# EAGLE board Goethe_Stromfluss (EAGLE 7.7.0)

Size 57.15 x 53.34 mm. Coordinates in mm from the lower left corner, seen from the top.
Copper layers (1*16): Top 0.035mm / dielectric 1.5mm / Bottom 0.035mm
Design rules "default": minimum track width 10mil, minimum drill 24mil, track to track 8mil, track to pad 8mil, pad to pad 8mil, via to via 8mil, smd to smd 8mil, copper to edge 40mil, drill to drill 8mil, minimum pad ring 10mil, minimum via ring 8mil, stop-mask expansion 4mil, vias tented up to drill 0mil, thermal gap 10mil

## Footprints (pad centres in the part's own frame; a part is rotated, then mirrored left to right if it is on the bottom)
C025-025X050 = drill 0.813 octagon: 1 -1.27,0; 2 1.27,0
1X03/90 = drill 1.016 long: 1 -2.54,-3.81; 2 0,-3.81; 3 2.54,-3.81
1X04/90 = drill 1.016 long: 1 -3.81,-3.81; 2 -1.27,-3.81; 3 1.27,-3.81; 4 3.81,-3.81
LED3MM = drill 0.813 octagon: A -1.27,0; K 1.27,0
ARDUINOR3_SMALL = drill 1 pad 1.676 octagon: 3V 24.13,2.54; 5V 26.67,2.54; A0 39.37,2.54; A1 41.91,2.54; A2 44.45,2.54; A3 46.99,2.54; A4 49.53,2.54; A5 52.07,2.54; AREF 12.446,50.8; D0 52.07,50.8; D1 49.53,50.8; D2 46.99,50.8; D3 44.45,50.8; D4 41.91,50.8; D5 39.37,50.8; D6 36.83,50.8; D7 34.29,50.8; D8 30.226,50.8; D9 27.686,50.8; D10 25.146,50.8; D11 22.606,50.8; D12 20.066,50.8; D13 17.526,50.8; GND 14.986,50.8; GND@1 31.75,2.54; GND@2 29.21,2.54; IOREF 19.05,2.54; RESERVED 16.51,2.54; RESET 21.59,2.54; SCL 7.366,50.8; SDA 9.906,50.8; VIN 34.29,2.54 | hole 3.2: 3.81,50.8; 2.54,2.54; 54.61,35.56; 54.61,7.62
0204/7 = drill 0.813 octagon: 1 -3.81,0; 2 3.81,0
0207/10 = drill 0.813 octagon: 1 -5.08,0; 2 5.08,0
R0805 = smd 1.3 x 1.5: 1 -0.95,0; 2 0.95,0

## Placement (x,y rotation side)
C1  10n  [C025-025X050]  35.56,7.62 180 top
JP1  [1X03/90]  -30.48,60.96 0 top  (outside the outline)
JP2  [1X04/90]  55.88,15.24 270 top
LED7  [LED3MM]  -27.94,71.12 0 top  (outside the outline)
M1  ARDUINO_R3_SMALL  [ARDUINOR3_SMALL]  0,0 0 top
R1  12k  [0204/7]  45.72,8.89 0 top
R2  120k  [0207/10]  43.18,16.51 0 top
R3  100M  [0204/7]  34.29,11.43 180 top
R4  100M  [0207/10]  33.02,13.97 0 top
R7  1k  [R0805]  -44.45,58.42 0 top  (outside the outline)
R8  1k  [R0805]  -49.53,58.42 0 top  (outside the outline)

## Library data of the parts
C1 R1-R4 R7 R8 = rcl
JP1 JP2 = pinhead
LED7 = led
M1 = 00_sm_arduino

## Nets
3V: M1.3V
+5V: M1.5V R4.1
GND: C1.2 JP1.1 JP1.3 LED7.K M1.GND M1.GND@1 M1.GND@2 R3.2
MEAS_IN: C1.1 M1.A0 R2.1 R3.1 R4.2
MEAS_OUT: M1.A1 R1.1
N$1: JP2.3 JP2.4 R1.2
N$3: JP2.1 JP2.2 R2.2
N$8: LED7.A R7.2
SUCCESS_OUT: R7.1 R8.1
SUCCESS_OUT_: JP1.2 R8.2
VIN: M1.VIN

## Tracks (layer width: path | path; a pad name or v marks a point on that pad's centre or on a via)
+5V  (1 unrouted)
GND  (7 unrouted)
MEAS_IN  (4 unrouted)
MEAS_OUT  (1 unrouted)
N$1  (2 unrouted)
N$3  (2 unrouted)
N$8  (1 unrouted)
SUCCESS_OUT  (1 unrouted)
SUCCESS_OUT_  (1 unrouted)